# EAGLE board MRCS-Candlestick-Base_array (EAGLE 7.7.0)
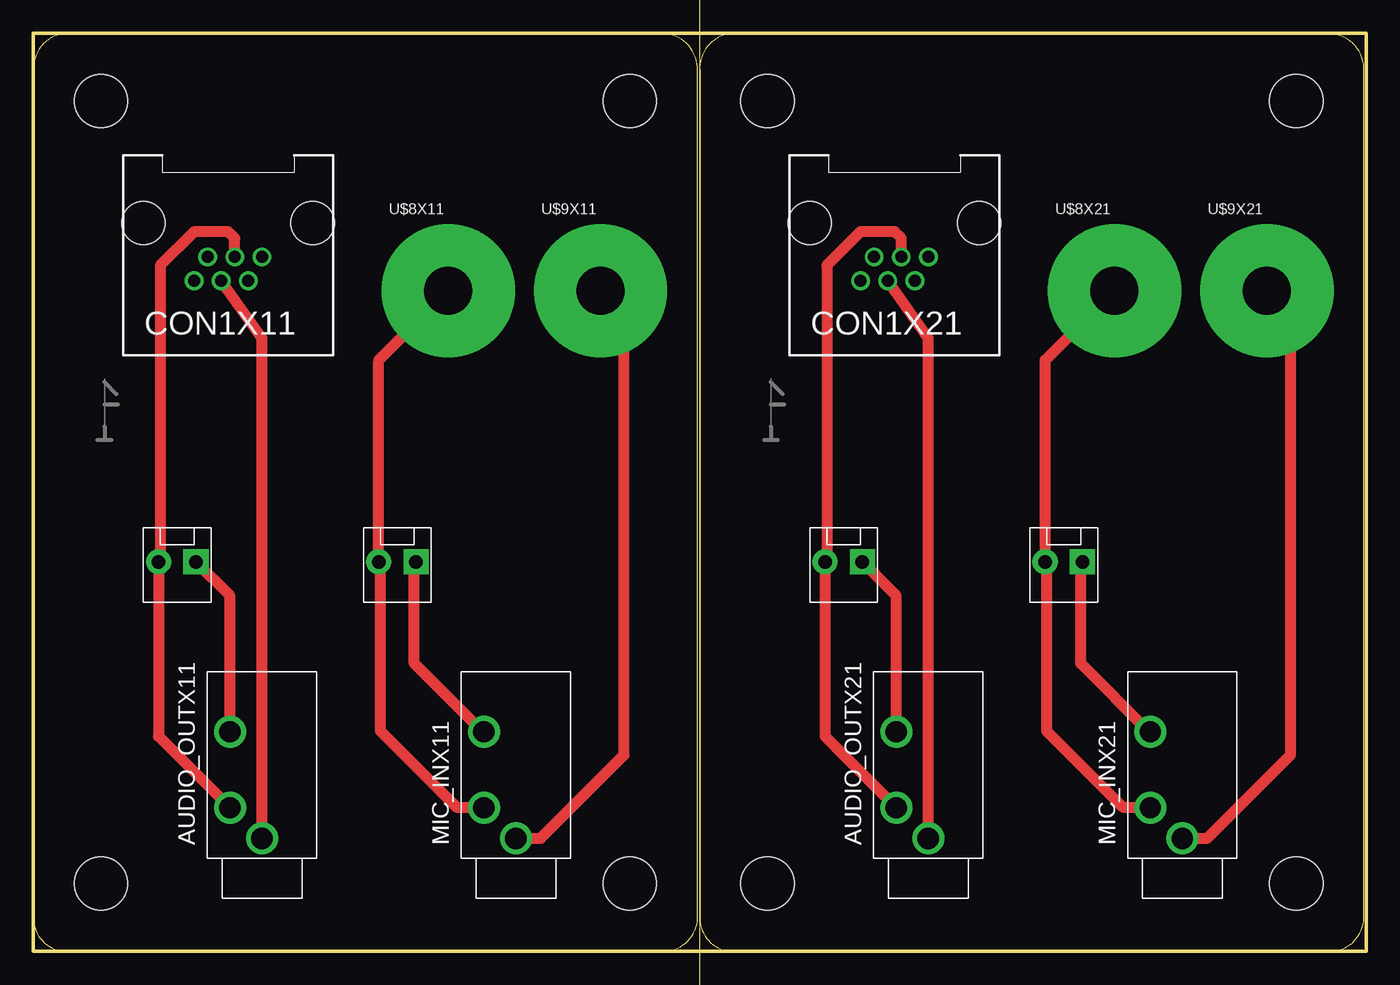
[diagram p0: board, top side]

Size 99.98 x 68.83 mm. Coordinates in mm from the lower left corner, seen from the top.
Outline: 0,0 99.98,0 99.98,68.83 0,68.83 0,0
Copper layers (1*16): Top 0.035mm / dielectric 1.5mm / Bottom 0.035mm
Design rules "default": minimum track width 10mil, minimum drill 0.6mm, track to track 8mil, track to pad 8mil, pad to pad 8mil, via to via 8mil, smd to smd 8mil, copper to edge 40mil, drill to drill 8mil, minimum pad ring 10mil, minimum via ring 8mil, stop-mask expansion 4mil, vias tented up to drill 0mil, thermal gap 10mil
Milling: 1 lines

## Footprints (pad centres in the part's own frame; a part is rotated, then mirrored left to right if it is on the bottom)
AUDIO-JACK-3.5MM_STEREO = drill 1.6: GND -5.5,0; RING 2.5,2.4; TIP -3.2,2.4
BOARD-DINRAIL-2.7IN-5CM = hole 4: 44.742,5.08; 5.08,63.754; 44.742,63.754; 5.08,5.08
RJ25-INVERTED = drill 0.9 pad 1.4: 1 2.54,4.318; 2 1.524,2.54; 3 0.508,4.318; 4 -0.508,2.54; 5 -1.524,4.318; 6 -2.54,2.54 | hole 3.251: -6.35,0; 6.35,0
MOLEX-1X2_LOCK = drill 1.016 pad 1.88 square: 1 -0.127,0 | drill 1.016 pad 1.88: 2 2.667,0
SPADELUGPAD = drill 3.6 pad 10: P1 0,0

## Placement (x,y rotation side)
AUDIO_OUTX11  [AUDIO-JACK-3.5MM_STEREO]  17.15,13.97 90 top
AUDIO_OUTX21  [AUDIO-JACK-3.5MM_STEREO]  67.13,13.97 90 top
BOARD1X11  [BOARD-DINRAIL-2.7IN-5CM]  0,0 0 top
BOARD1X21  [BOARD-DINRAIL-2.7IN-5CM]  49.99,0 0 top
CON1X11  [RJ25-INVERTED]  14.61,54.61 180 top
CON1X21  [RJ25-INVERTED]  64.59,54.61 180 top
JP1X11  [MOLEX-1X2_LOCK]  12.07,29.21 180 top
JP1X21  [MOLEX-1X2_LOCK]  62.05,29.21 180 top
JP2X11  [MOLEX-1X2_LOCK]  28.58,29.21 180 top
JP2X21  [MOLEX-1X2_LOCK]  78.56,29.21 180 top
MIC_INX11  [AUDIO-JACK-3.5MM_STEREO]  36.2,13.97 90 top
MIC_INX21  [AUDIO-JACK-3.5MM_STEREO]  86.18,13.97 90 top
U$5X11  [MRCSLOGOTOP]  4.07,37.85 0 top
U$5X21  [MRCSLOGOTOP]  54.05,37.85 0 top
U$6X11  [MRCSLOGOBTM]  4.07,37.85 0 top
U$6X21  [MRCSLOGOBTM]  54.05,37.85 0 top
U$7X11  [CA-PROP65-BACK]  48.64,33.27 0 top
U$7X21  [CA-PROP65-BACK]  98.63,33.27 0 top
U$8X11  [SPADELUGPAD]  31.12,49.53 0 top
U$8X21  [SPADELUGPAD]  81.1,49.53 0 top
U$9X11  [SPADELUGPAD]  42.55,49.53 0 top
U$9X21  [SPADELUGPAD]  92.53,49.53 0 top

## Library data of the parts
AUDIO_OUTX11 AUDIO_OUTX21 BOARD1X11 BOARD1X21 CON1X11 CON1X21 JP1X11 JP1X21 JP2X11 JP2X21 MIC_INX11 MIC_INX21 U$5X11 U$5X21 U$6X11 U$6X21 U$7X11 U$7X21 U$8X11 U$8X21 U$9X11 U$9X21 = SPCoast

## Nets
N$1X11: AUDIO_OUTX11.TIP CON1X11.4 JP1X11.2
N$1X21: AUDIO_OUTX21.TIP CON1X21.4 JP1X21.2
N$2X11: AUDIO_OUTX11.GND CON1X11.3
N$2X21: AUDIO_OUTX21.GND CON1X21.3
N$3X11: AUDIO_OUTX11.RING JP1X11.1
N$3X21: AUDIO_OUTX21.RING JP1X21.1
N$4X11: MIC_INX11.GND U$9X11.P1
N$4X21: MIC_INX21.GND U$9X21.P1
N$5X11: JP2X11.2 MIC_INX11.TIP U$8X11.P1
N$5X21: JP2X21.2 MIC_INX21.TIP U$8X21.P1
N$6X11: JP2X11.1 MIC_INX11.RING
N$6X21: JP2X21.1 MIC_INX21.RING

## Tracks (layer width: path | path; a pad name or v marks a point on that pad's centre or on a via)
N$1X11
  Top 0.813: CON1X11.4 15.12,53.47 14.61,53.98 12.07,53.98 9.53,51.44 9.53,29.34 JP1X11.2 9.4,16.12 AUDIO_OUTX11.TIP
N$1X21
  Top 0.813: CON1X21.4 65.1,53.47 64.59,53.98 62.05,53.98 59.51,51.44 59.51,29.34 JP1X21.2 59.39,16.12 AUDIO_OUTX21.TIP
N$2X11
  Top 0.813: AUDIO_OUTX11.GND 17.15,45.97 CON1X11.3
N$2X21
  Top 0.813: AUDIO_OUTX21.GND 67.13,45.97 CON1X21.3
N$3X11
  Top 0.813: AUDIO_OUTX11.RING 14.75,26.66 JP1X11.1
N$3X21
  Top 0.813: AUDIO_OUTX21.RING 64.73,26.66 JP1X21.1
N$4X11
  Top 0.406: 44.33,47.5 44.33,47.75
  Top 0.813: MIC_INX11.GND 38.06,8.47 44.33,14.73 44.33,47.5 | 44.33,47.75 U$9X11.P1
N$4X21
  Top 0.406: 94.31,47.5 94.31,47.75
  Top 0.813: MIC_INX21.GND 88.05,8.47 94.31,14.73 94.31,47.5 | 94.31,47.75 U$9X21.P1
N$5X11
  Top 0.305: 26.04,29.08 JP2X11.2
  Top 0.406: 25.91,44.25 25.91,44.32
  Top 0.813: JP2X11.2 25.91,44.25 | MIC_INX11.TIP 31.78,10.77 26.04,16.51 26.04,29.08 | 25.91,44.32 U$8X11.P1
N$5X21
  Top 0.305: 76.02,29.08 JP2X21.2
  Top 0.406: 75.9,44.25 75.9,44.32
  Top 0.813: JP2X21.2 75.9,44.25 | MIC_INX21.TIP 81.76,10.77 76.02,16.51 76.02,29.08 | 75.9,44.32 U$8X21.P1
N$6X11
  Top 0.305: MIC_INX11.RING 33.7,16.47 | 28.58,29.08 JP2X11.1
  Top 0.813: 33.7,16.47 28.58,21.59 28.58,29.08
N$6X21
  Top 0.305: MIC_INX21.RING 83.68,16.47 | 78.56,29.08 JP2X21.1
  Top 0.813: 83.68,16.47 78.56,21.59 78.56,29.08

## Text on the board
Milling: V-Score
tDocu: Candlestick phone adapter | Candlestick phone adapter | Mic + Mic - | Mic + Mic -
_tNames: AUDIO_OUT | MIC_IN | AUDIO_OUT | MIC_IN